# Altium PCB LightLinkV3.0.PcbDoc
Units mil, origin at the board's own origin, x right, y up, seen from the top; angles counter-clockwise.
Board outline 6000 x 4000 mil, 2 copper layers (Top Layer, Bottom Layer); 136 components, 119 nets, 550 pads, 0 vias.
Unrouted connection lines stored in the file: 306.
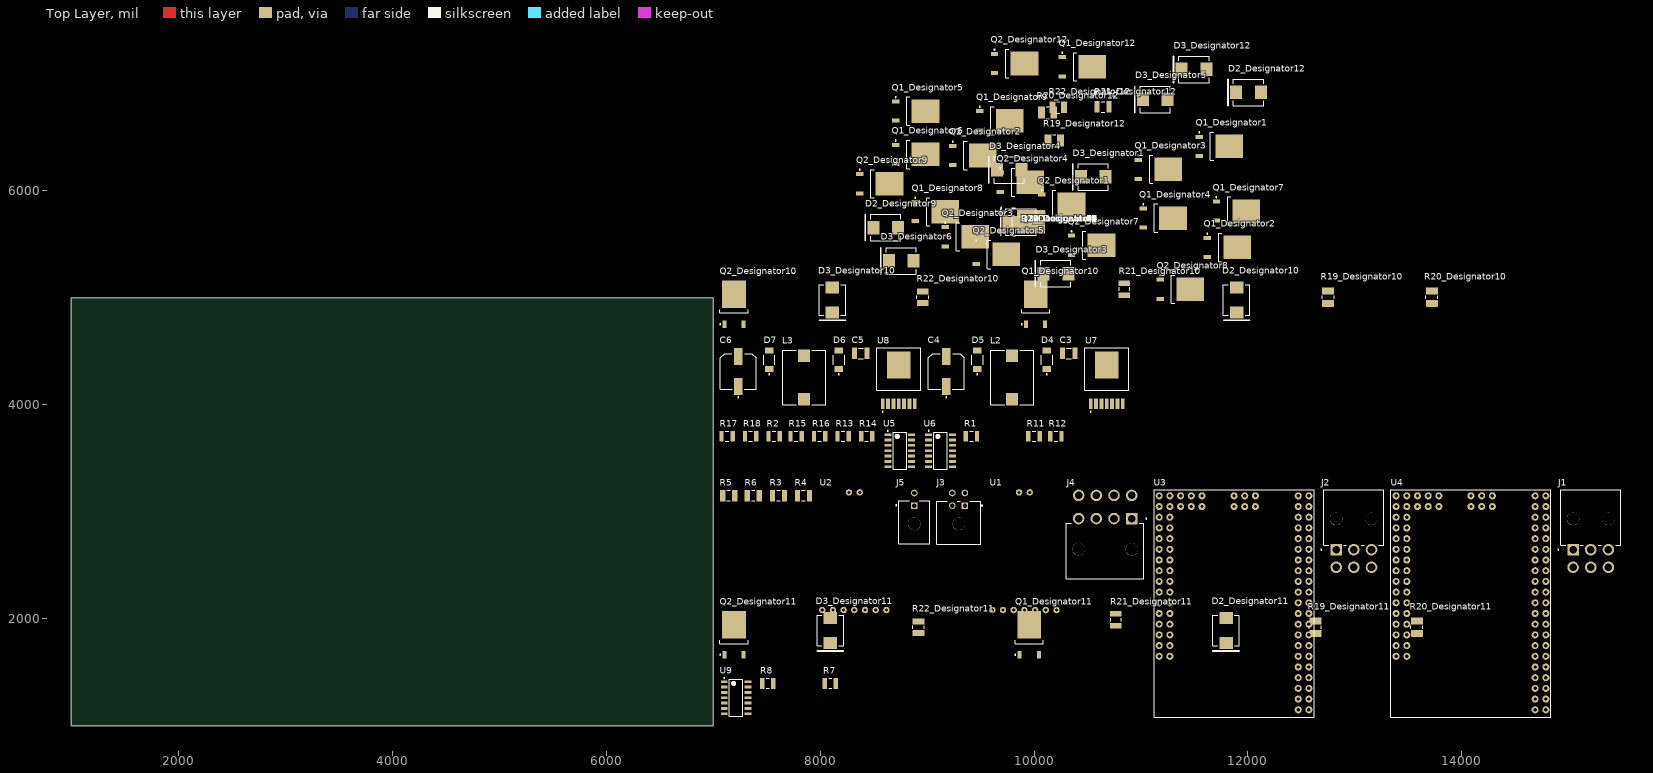
[diagram p0: Top Layer view]
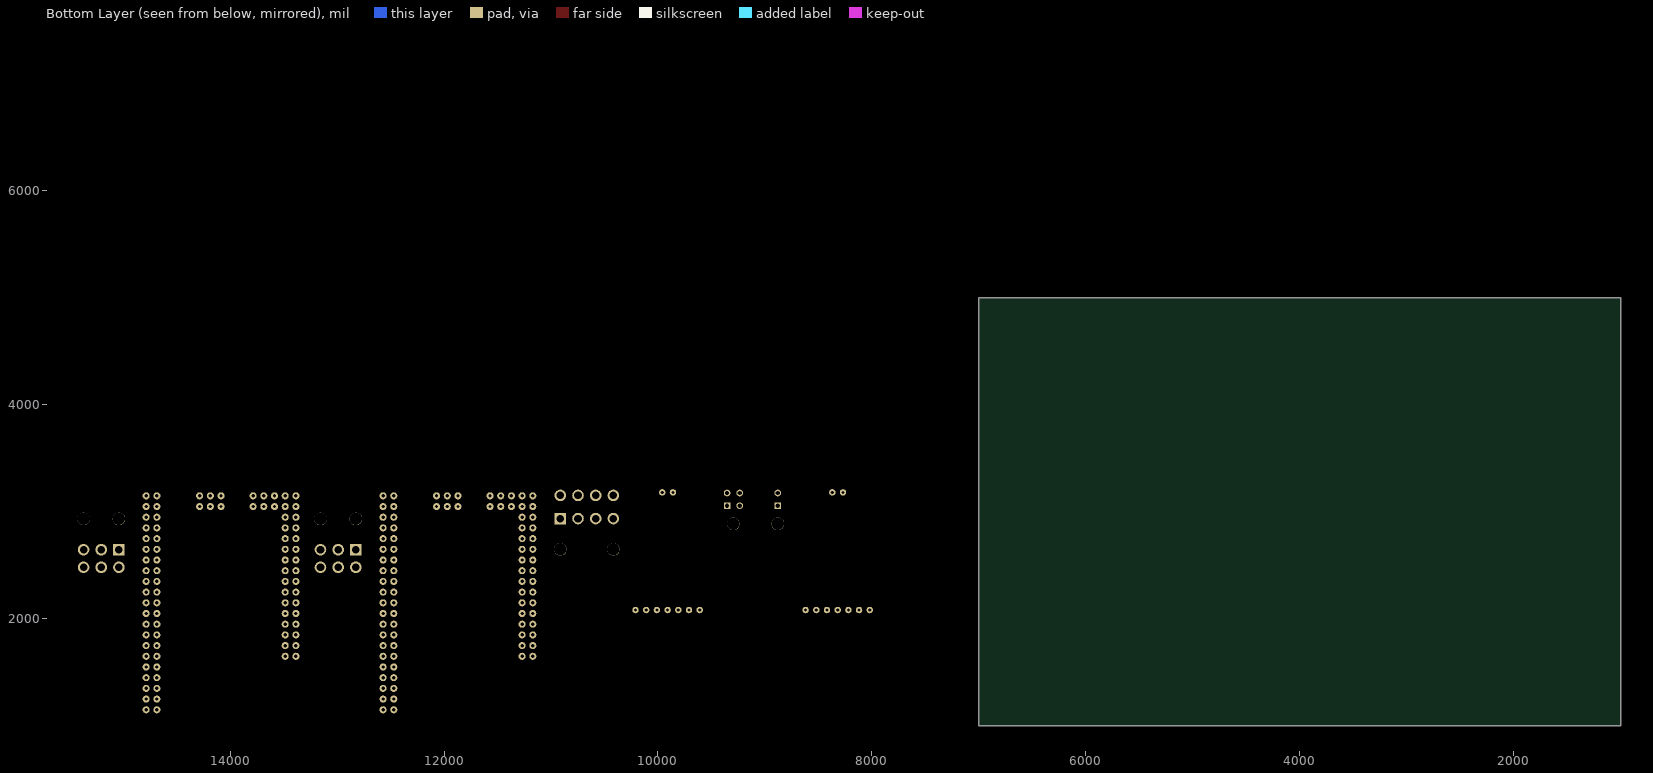
[diagram p1: Bottom Layer view, seen from below]

## Layer stack, top to bottom
Top Solder: solder mask 0.4, Solder Resist, Dk 3.5
Top Layer: signal copper 1.4
Dielectric 1: dielectric 12.6, FR-4, Dk 4.8
Bottom Layer: signal copper 1.4
Bottom Solder: solder mask 0.4, Solder Resist, Dk 3.5

## Board outline
1000,1000 7000,1000 7000,5000 1000,5000

## Design rules (kind name [scope] priority, off if disabled: settings)
Clearance [All] p1: gap=10 ignorepadtopadclearanceinfootprint=FALSE except(0: Arc-Hole Track-Hole SMDPad-Hole THPad-Hole Via-Hole Fill-Hole Poly-Hole Region-Hole Text-Hole)
PolygonConnect [All] p1: connectstyle=Relief reliefconductorwidth=10 reliefentries=4 polygonreliefangle="90 Angle" airgapwidth=10
RoutingVias [All] p1: holewidth=28 width=50 viastyle="Through Hole" minholewidth=28 minwidth=50 maxholewidth=28 maxwidth=50
SolderMaskExpansion [All] p1: expansion=4 istentingtop=FALSE
Width [All] p1: maxlimit=10 minlimit=10 preferedwidth=10
30 further rules are at their usual default settings.

## Classes and differential pairs
component class Designator12: D2_Designator12 D3_Designator12 Q1_Designator12 Q2_Designator12 R19_Designator12 R20_Designator12 R21_Designator12 R22_Designator12
component class Designator11: D2_Designator11 D3_Designator11 Q1_Designator11 Q2_Designator11 R19_Designator11 R20_Designator11 R21_Designator11 R22_Designator11
channel class MOSFET_V2: Designator1 Designator2 Designator3 Designator4 Designator5 Designator6 Designator7 Designator8 Designator9 Designator10 Designator11 Designator12
component class Regulator: C3 C4 C5 C6 D4 D5 D6 D7 L2 L3 U7 U8
component class MOSFET_schematic: R1 R2 R7 R8 R11 R12 R13 R14 R15 R16 R17 R18 U5 U6
component class LightLinkV2: J1 J2 J3 J4 J5 R3 R4 R5 R6 U1 U2 U3 U4
component class Designator10: D2_Designator10 D3_Designator10 Q1_Designator10 Q2_Designator10 R19_Designator10 R20_Designator10 R21_Designator10 R22_Designator10
component class Designator9: D2_Designator9 D3_Designator9 Q1_Designator9 Q2_Designator9 R19_Designator9 R20_Designator9 R21_Designator9 R22_Designator9
component class Designator8: D2_Designator8 D3_Designator8 Q1_Designator8 Q2_Designator8 R19_Designator8 R20_Designator8 R21_Designator8 R22_Designator8
component class Designator7: D2_Designator7 D3_Designator7 Q1_Designator7 Q2_Designator7 R19_Designator7 R20_Designator7 R21_Designator7 R22_Designator7
component class Designator6: D2_Designator6 D3_Designator6 Q1_Designator6 Q2_Designator6 R19_Designator6 R20_Designator6 R21_Designator6 R22_Designator6
component class Designator5: D2_Designator5 D3_Designator5 Q1_Designator5 Q2_Designator5 R19_Designator5 R20_Designator5 R21_Designator5 R22_Designator5
component class Designator4: D2_Designator4 D3_Designator4 Q1_Designator4 Q2_Designator4 R19_Designator4 R20_Designator4 R21_Designator4 R22_Designator4
component class Designator3: D2_Designator3 D3_Designator3 Q1_Designator3 Q2_Designator3 R19_Designator3 R20_Designator3 R21_Designator3 R22_Designator3
component class Designator2: D2_Designator2 D3_Designator2 Q1_Designator2 Q2_Designator2 R19_Designator2 R20_Designator2 R21_Designator2 R22_Designator2
component class Designator1: D2_Designator1 D3_Designator1 Q1_Designator1 Q2_Designator1 R19_Designator1 R20_Designator1 R21_Designator1 R22_Designator1

## Components (designator, comment, footprint, x,y, rotation, side; value= is the part's Value field where it differs from the comment)
C3 "CAP 10nF 250V 1210(3225)" CAPC1210(3225)100_N 10325,4480 r0 top value=10nF
C4 "EEEFT1H221AP" FP-FTF-MFG 9180,4310 r90 top
C5 "CAP 10nF 250V 1210(3225)" CAPC1210(3225)100_N 8380,4480 r0 top value=10nF
C6 "EEEFT1H221AP" FP-FTF-MFG 7235,4310 r90 top
D2_Designator1 "B560C-13-F" DIOD-B5X0C-2_M 9879.5,5709.5 r0 top (schematic designator D2)
D2_Designator2 "B560C-13-F" DIOD-B5X0C-2_M 9879.5,5709.5 r0 top (schematic designator D2)
D2_Designator3 "B560C-13-F" DIOD-B5X0C-2_M 9879.5,5709.5 r0 top (schematic designator D2)
D2_Designator4 "B560C-13-F" DIOD-B5X0C-2_M 9879.5,5709.5 r0 top (schematic designator D2)
D2_Designator5 "B560C-13-F" DIOD-B5X0C-2_M 9879.5,5709.5 r0 top (schematic designator D2)
D2_Designator6 "B560C-13-F" DIOD-B5X0C-2_M 9879.5,5709.5 r0 top (schematic designator D2)
D2_Designator7 "B560C-13-F" DIOD-B5X0C-2_M 9879.5,5709.5 r0 top (schematic designator D2)
D2_Designator8 "B560C-13-F" DIOD-B5X0C-2_M 9879.5,5709.5 r0 top (schematic designator D2)
D2_Designator9 "B560C-13-F" DIOD-B5X0C-2_M 8613.86,5655 r0 top (schematic designator D2)
D2_Designator10 "B560C-13-F" DIOD-B5X0C-2_M 11895,4980 r90 top (schematic designator D2)
D2_Designator11 "B560C-13-F" DIOD-B5X0C-2_M 11795,1890 r90 top (schematic designator D2)
D2_Designator12 "B560C-13-F" DIOD-B5X0C-2_M 12005,6920 r0 top (schematic designator D2)
D3_Designator1 "B560C-13-F" DIOD-B5X0C-2_M 10553.86,6130 r0 top (schematic designator D3)
D3_Designator2 "B560C-13-F" DIOD-B5X0C-2_M 9879.5,5709.5 r0 top (schematic designator D3)
D3_Designator3 "B560C-13-F" DIOD-B5X0C-2_M 10203.86,5225 r0 top (schematic designator D3)
D3_Designator4 "B560C-13-F" DIOD-B5X0C-2_M 9768.86,6195 r0 top (schematic designator D3)
D3_Designator5 "B560C-13-F" DIOD-B5X0C-2_M 11133.86,6855 r0 top (schematic designator D3)
D3_Designator6 "B560C-13-F" DIOD-B5X0C-2_M 8758.86,5345 r0 top (schematic designator D3)
D3_Designator7 "B560C-13-F" DIOD-B5X0C-2_M 9879.5,5709.5 r0 top (schematic designator D3)
D3_Designator8 "B560C-13-F" DIOD-B5X0C-2_M 9879.5,5709.5 r0 top (schematic designator D3)
D3_Designator9 "B560C-13-F" DIOD-B5X0C-2_M 9879.5,5709.5 r0 top (schematic designator D3)
D3_Designator10 "B560C-13-F" DIOD-B5X0C-2_M 8115,4980 r90 top (schematic designator D3)
D3_Designator11 "B560C-13-F" DIOD-B5X0C-2_M 8095,1890 r90 top (schematic designator D3)
D3_Designator12 "B560C-13-F" DIOD-B5X0C-2_M 11495,7135 r0 top (schematic designator D3)
D4 "RSX501LAM20TR" FP-PMDTM-MFG 10120,4420 r90 top
D5 "RSX501LAM20TR" FP-PMDTM-MFG 9470,4420 r90 top
D6 "RSX501LAM20TR" FP-PMDTM-MFG 8175,4420 r90 top
D7 "RSX501LAM20TR" FP-PMDTM-MFG 7525,4420 r90 top
J1 "455580003" FP-455580003-MFG 15205,2940 r0 top
J2 "455580003" FP-455580003-MFG 12990,2940 r0 top
J3 "43045-0400" FP-43045-0400-MFG 9295,2900 r0 top
J4 "39-30-0080" FP-39-30-0080-MFG 10665,2640 r0 top
J5 "43045-0202" FP-43045-0202-MFG 8880,2900 r0 top
L2 "74456047" WE-PD4-L 9795,4255 r90 top
L3 "74456047" WE-PD4-L 7850,4255 r90 top
Q1_Designator1 "SPD30P06P G" INF-PG-TO252-3-1_N 11732.48,6415 r0 top (schematic designator Q1)
Q1_Designator2 "SPD30P06P G" INF-PG-TO252-3-1_N 11807.48,5470 r0 top (schematic designator Q1)
Q1_Designator3 "SPD30P06P G" INF-PG-TO252-3-1_N 11162.48,6200 r0 top (schematic designator Q1)
Q1_Designator4 "SPD30P06P G" INF-PG-TO252-3-1_N 11207.48,5745 r0 top (schematic designator Q1)
Q1_Designator5 "SPD30P06P G" INF-PG-TO252-3-1_N 8892.48,6745 r0 top (schematic designator Q1)
Q1_Designator6 "SPD30P06P G" INF-PG-TO252-3-1_N 8892.48,6340 r0 top (schematic designator Q1)
Q1_Designator7 "SPD30P06P G" INF-PG-TO252-3-1_N 11892.48,5810 r0 top (schematic designator Q1)
Q1_Designator8 "SPD30P06P G" INF-PG-TO252-3-1_N 9077.48,5805 r0 top (schematic designator Q1)
Q1_Designator9 "SPD30P06P G" INF-PG-TO252-3-1_N 9680,6655 r0 top (schematic designator Q1)
Q1_Designator10 "SPD30P06P G" INF-PG-TO252-3-1_N 10015,4940 r90 top (schematic designator Q1)
Q1_Designator11 "SPD30P06P G" INF-PG-TO252-3-1_N 9955,1850 r90 top (schematic designator Q1)
Q1_Designator12 "SPD30P06P G" INF-PG-TO252-3-1_N 10452.48,7160 r0 top (schematic designator Q1)
Q2_Designator1 "SPD30P06P G" INF-PG-TO252-3-1_N 10257.48,5875 r0 top (schematic designator Q2)
Q2_Designator2 "SPD30P06P G" INF-PG-TO252-3-1_N 9427.48,6330 r0 top (schematic designator Q2)
Q2_Designator3 "SPD30P06P G" INF-PG-TO252-3-1_N 9357.48,5570 r0 top (schematic designator Q2)
Q2_Designator4 "SPD30P06P G" INF-PG-TO252-3-1_N 9872.48,6080 r0 top (schematic designator Q2)
Q2_Designator5 "SPD30P06P G" INF-PG-TO252-3-1_N 9647.48,5405 r0 top (schematic designator Q2)
Q2_Designator6 "SPD30P06P G" INF-PG-TO252-3-1_N 9879.5,5709.5 r0 top (schematic designator Q2)
Q2_Designator7 "SPD30P06P G" INF-PG-TO252-3-1_N 10537.48,5490 r0 top (schematic designator Q2)
Q2_Designator8 "SPD30P06P G" INF-PG-TO252-3-1_N 11367.48,5080 r0 top (schematic designator Q2)
Q2_Designator9 "SPD30P06P G" INF-PG-TO252-3-1_N 8557.48,6065 r0 top (schematic designator Q2)
Q2_Designator10 "SPD30P06P G" INF-PG-TO252-3-1_N 7195,4940 r90 top (schematic designator Q2)
Q2_Designator11 "SPD30P06P G" INF-PG-TO252-3-1_N 7195,1850 r90 top (schematic designator Q2)
Q2_Designator12 "SPD30P06P G" INF-PG-TO252-3-1_N 9817.48,7190 r0 top (schematic designator Q2)
R1 "ERJ14BQFR68U" RESC3225X70X50LL20T20 9415,3705 r0 top
R2 "ERJ14BQFR68U" RESC3225X70X50LL20T20 7570,3705 r0 top
R3 "ERJ-14NF1001U" RESC3225X70X50NL20T20 7610,3150 r0 top
R4 "ERJ-14YJ302U" RESC3225X70X50NL20T20 7845,3150 r0 top
R5 "ERJ-14NF1001U" RESC3225X70X50NL20T20 7145,3150 r0 top
R6 "ERJ-14YJ302U" RESC3225X70X50NL20T20 7375,3150 r0 top
R7 "ERJ14BQFR68U" RESC3225X70X50LL20T20 8095,1395 r0 top
R8 "ERJ14BQFR68U" RESC3225X70X50LL20T20 7510,1395 r0 top
R11 "ERJ14BQFR68U" RESC3225X70X50LL20T20 10000,3705 r0 top
R12 "ERJ14BQFR68U" RESC3225X70X50LL20T20 10205,3705 r0 top
R13 "ERJ14BQFR68U" RESC3225X70X50LL20T20 8215,3705 r0 top
R14 "ERJ14BQFR68U" RESC3225X70X50LL20T20 8435,3705 r0 top
R15 "ERJ14BQFR68U" RESC3225X70X50LL20T20 7775,3705 r0 top
R16 "ERJ14BQFR68U" RESC3225X70X50LL20T20 7995,3705 r0 top
R17 "ERJ14BQFR68U" RESC3225X70X50LL20T20 7130,3705 r0 top
R18 "ERJ14BQFR68U" RESC3225X70X50LL20T20 7350,3705 r0 top
R19_Designator1 "RMCF1210FT1K00" FP-RMCF1210-IPC_A 9879.5,5709.5 r0 top (schematic designator R19)
R19_Designator2 "RMCF1210FT1K00" FP-RMCF1210-IPC_A 9879.5,5709.5 r0 top (schematic designator R19)
R19_Designator3 "RMCF1210FT1K00" FP-RMCF1210-IPC_A 9879.5,5709.5 r0 top (schematic designator R19)
R19_Designator4 "RMCF1210FT1K00" FP-RMCF1210-IPC_A 9879.5,5709.5 r0 top (schematic designator R19)
R19_Designator5 "RMCF1210FT1K00" FP-RMCF1210-IPC_A 9879.5,5709.5 r0 top (schematic designator R19)
R19_Designator6 "RMCF1210FT1K00" FP-RMCF1210-IPC_A 9879.5,5709.5 r0 top (schematic designator R19)
R19_Designator7 "RMCF1210FT1K00" FP-RMCF1210-IPC_A 9879.5,5709.5 r0 top (schematic designator R19)
R19_Designator8 "RMCF1210FT1K00" FP-RMCF1210-IPC_A 9879.5,5709.5 r0 top (schematic designator R19)
R19_Designator9 "RMCF1210FT1K00" FP-RMCF1210-IPC_A 9879.5,5709.5 r0 top (schematic designator R19)
R19_Designator10 "RMCF1210FT1K00" FP-RMCF1210-IPC_A 12750,5005 r90 top (schematic designator R19)
R19_Designator11 "RMCF1210FT1K00" FP-RMCF1210-IPC_A 12630,1920 r90 top (schematic designator R19)
R19_Designator12 "RMCF1210FT1K00" FP-RMCF1210-IPC_A 10189.5,6469.5 r0 top (schematic designator R19)
R20_Designator1 "RMCF1210JT3R00" FP-RMCF1210-IPC_A 9879.5,5709.5 r0 top (schematic designator R20)
R20_Designator2 "RMCF1210JT3R00" FP-RMCF1210-IPC_A 9879.5,5709.5 r0 top (schematic designator R20)
R20_Designator3 "RMCF1210JT3R00" FP-RMCF1210-IPC_A 9879.5,5709.5 r0 top (schematic designator R20)
R20_Designator4 "RMCF1210JT3R00" FP-RMCF1210-IPC_A 9879.5,5709.5 r0 top (schematic designator R20)
R20_Designator5 "RMCF1210JT3R00" FP-RMCF1210-IPC_A 9879.5,5709.5 r0 top (schematic designator R20)
R20_Designator6 "RMCF1210JT3R00" FP-RMCF1210-IPC_A 9879.5,5709.5 r0 top (schematic designator R20)
R20_Designator7 "RMCF1210JT3R00" FP-RMCF1210-IPC_A 9879.5,5709.5 r0 top (schematic designator R20)
R20_Designator8 "RMCF1210JT3R00" FP-RMCF1210-IPC_A 9879.5,5709.5 r0 top (schematic designator R20)
R20_Designator9 "RMCF1210JT3R00" FP-RMCF1210-IPC_A 9879.5,5709.5 r0 top (schematic designator R20)
R20_Designator10 "RMCF1210JT3R00" FP-RMCF1210-IPC_A 13720,5005 r90 top (schematic designator R20)
R20_Designator11 "RMCF1210JT3R00" FP-RMCF1210-IPC_A 13580,1920 r90 top (schematic designator R20)
R20_Designator12 "RMCF1210JT3R00" FP-RMCF1210-IPC_A 10126.91,6730 r0 top (schematic designator R20)
R21_Designator1 "ERJ-14NF1002U" RESC3225X70X50NL20T20 9879.5,5709.5 r0 top (schematic designator R21)
R21_Designator2 "ERJ-14NF1002U" RESC3225X70X50NL20T20 9879.5,5709.5 r0 top (schematic designator R21)
R21_Designator3 "ERJ-14NF1002U" RESC3225X70X50NL20T20 9879.5,5709.5 r0 top (schematic designator R21)
R21_Designator4 "ERJ-14NF1002U" RESC3225X70X50NL20T20 9879.5,5709.5 r0 top (schematic designator R21)
R21_Designator5 "ERJ-14NF1002U" RESC3225X70X50NL20T20 9879.5,5709.5 r0 top (schematic designator R21)
R21_Designator6 "ERJ-14NF1002U" RESC3225X70X50NL20T20 9879.5,5709.5 r0 top (schematic designator R21)
R21_Designator7 "ERJ-14NF1002U" RESC3225X70X50NL20T20 9879.5,5709.5 r0 top (schematic designator R21)
R21_Designator8 "ERJ-14NF1002U" RESC3225X70X50NL20T20 9879.5,5709.5 r0 top (schematic designator R21)
R21_Designator9 "ERJ-14NF1002U" RESC3225X70X50NL20T20 9879.5,5709.5 r0 top (schematic designator R21)
R21_Designator10 "ERJ-14NF1002U" RESC3225X70X50NL20T20 10845,5080 r90 top (schematic designator R21)
R21_Designator11 "ERJ-14NF1002U" RESC3225X70X50NL20T20 10765,1990 r90 top (schematic designator R21)
R21_Designator12 "ERJ-14NF1002U" RESC3225X70X50NL20T20 10643.9,6785 r0 top (schematic designator R21)
R22_Designator1 "RMCF1210JT12R0" FP-RMCF1210-IPC_B 9879.5,5709.5 r0 top (schematic designator R22)
R22_Designator2 "RMCF1210JT12R0" FP-RMCF1210-IPC_B 9879.5,5709.5 r0 top (schematic designator R22)
R22_Designator3 "RMCF1210JT12R0" FP-RMCF1210-IPC_B 9879.5,5709.5 r0 top (schematic designator R22)
R22_Designator4 "RMCF1210JT12R0" FP-RMCF1210-IPC_B 9879.5,5709.5 r0 top (schematic designator R22)
R22_Designator5 "RMCF1210JT12R0" FP-RMCF1210-IPC_B 9879.5,5709.5 r0 top (schematic designator R22)
R22_Designator6 "RMCF1210JT12R0" FP-RMCF1210-IPC_B 9879.5,5709.5 r0 top (schematic designator R22)
R22_Designator7 "RMCF1210JT12R0" FP-RMCF1210-IPC_B 9879.5,5709.5 r0 top (schematic designator R22)
R22_Designator8 "RMCF1210JT12R0" FP-RMCF1210-IPC_B 9879.5,5709.5 r0 top (schematic designator R22)
R22_Designator9 "RMCF1210JT12R0" FP-RMCF1210-IPC_B 9879.5,5709.5 r0 top (schematic designator R22)
R22_Designator10 "RMCF1210JT12R0" FP-RMCF1210-IPC_B 8960,5005 r90 top (schematic designator R22)
R22_Designator11 "RMCF1210JT12R0" FP-RMCF1210-IPC_B 8920,1920 r90 top (schematic designator R22)
R22_Designator12 "RMCF1210JT12R0" FP-RMCF1210-IPC_B 10225,6780 r0 top (schematic designator R22)
U1 "MCP2515 Shield" "MCP2515 Shield-Footprint-1" 9610,2080 r90 top
U2 "MCP2515 Shield" "MCP2515 Shield-Footprint-1" 8020,2080 r90 top
U3 "MEGA_PRO_EMBED_CH340G_/_ATMEGA2560" MODULE_MEGA_PRO_EMBED_CH340G_/_ATMEGA2560 11870,2140 r90 top
U4 "MEGA_PRO_EMBED_CH340G_/_ATMEGA2560" MODULE_MEGA_PRO_EMBED_CH340G_/_ATMEGA2560 14085,2140 r90 top
U5 "TL074CD" D0014A_M 8745,3570 r0 top
U6 "TL074CD" D0014A_M 9125,3570 r0 top
U7 "LM22679TJE-5.0/NOPB" FP-NDR0007A-MFG 10680,4335 r0 top
U8 "LM22679TJE-5.0/NOPB" FP-NDR0007A-MFG 8735,4335 r0 top
U9 "TL074CD" D0014A_M 7215,1260 r0 top

## Footprints (in the part's own frame and the unit in brackets; to place one, negate y for a bottom-side part, rotate by r counter-clockwise, add the part's x,y. Pads: shape width x height; smd on the part's side, far side on the other; paste and mask are expansions set on the pad)
CAPC1210(3225)100_N [mm] "Chip Capacitor, Body 3.2x2.5mm, Height 1mm, IPC Medium Density"
  rect 1.15x2.7 smd: 1(-1.5,0) 2(1.5,0)
  silkscreen extent -0.55,-1.25 0.55,1.25, body extent -1.7,-1.35 1.7,1.35, height 1
D0014A_M [mm] "SOIC, 14-Leads, Body 8.75x4mm, Pitch 1.27mm, IPC Low Density"
  rrect15% 1.65x0.65 smd: 1(-2.825,3.81) 2(-2.825,2.54) 3(-2.825,1.27) 4(-2.825,0) 5(-2.825,-1.27) 6(-2.825,-2.54) 7(-2.825,-3.81) 8(2.825,-3.81) 9(2.825,-2.54) 10(2.825,-1.27) 11(2.825,0) 12(2.825,1.27) 13(2.825,2.54) 14(2.825,3.81)
  silkscreen extent -2.95,-4.38 1.6,4.81, body extent -3.02,-4.32 3.02,4.32, height 1.59
DIOD-B5X0C-2_M [mm] "Molded Diode, 2-Leads, Body 7.11x6.22mm, IPC Low Density"
  rect 2.85x3.2 smd: 1(-2.95,0) 2(2.95,0)
  silkscreen extent -4.87,-3.15 3.6,3.15, body extent -3.56,-3.11 3.55,3.11, height 2.63
FP-39-30-0080-MFG [mm]
  rect 2.75x2.75 hole 1.8 paste-1000 mask+0: 1(6.3,7.5)
  round 2.75 hole 1.8 paste-1000 mask+0: 2(2.1,7.5) 3(-2.1,7.5) 4(-6.3,7.5) 5(6.3,13) 6(2.1,13) 7(-2.1,13) 8(-6.3,13)
  round 3 hole 3 unplated paste-1000 mask+0: ""(-6.3,0.2) ""(6.3,0.2)
  silkscreen extent -9.19,-6.78 9.92,7.62, body extent -9.29,-6.88 9.29,14.48, height 0.25
FP-43045-0202-MFG [mm]
  rect 1.57x1.57 hole 1.02 paste-1000 mask+0: 1(0,3.965)
  round 1.57 hole 1.02 paste-1000 mask+0: 2(0,6.965)
  round 3 hole 3 unplated paste-1000 mask+0: ""(0,-0.355)
  silkscreen extent -4.4,-5.08 3.7,5.08, body extent -3.8,-5.18 3.8,7.85, height 0.25
FP-43045-0400-MFG [mm]
  rect 1.57x1.57 hole 1.02 paste-1000 mask+0: 1(1.5,3.965)
  round 1.57 hole 1.02 paste-1000 mask+0: 2(-1.5,3.965) 3(1.5,6.965) 4(-1.5,6.965)
  round 3 hole 3 unplated paste-1000 mask+0: ""(0,-0.355)
  silkscreen extent -5.2,-5.21 5.68,4.95, body extent -5.3,-5.31 5.3,7.85, height 0.25
FP-455580003-MFG [mm]
  rect 2.75x2.75 hole 1.8 paste-1000 mask+0: 1(-4.2,-7.5)
  round 2.75 hole 1.8 paste-1000 mask+0: 2(0,-7.5) 3(4.2,-7.5) 4(-4.2,-11.7) 5(0,-11.7) 6(4.2,-11.7)
  round 3 hole 3 unplated paste-1000 mask+0: ""(-4.2,-0.2) ""(4.2,-0.2)
  silkscreen extent -7.81,-7.62 7.09,6.78, body extent -7.19,-13.18 7.19,6.88, height 0.25
FP-FTF-MFG [mm]
  rect 4x2 smd paste+0 mask+0: 1(-3.55,0) 2(3.55,0)
  silkscreen extent -6.27,-4.25 4.25,4.25, body extent -5.8,-4.5 5.8,4.5, height 0.25
FP-NDR0007A-MFG [mm]
  rect 0.91x2.41 smd paste+0 mask+0: 1(-3.81,-8.28) 2(-2.54,-8.28) 3(-1.27,-8.28) 4(0,-8.28) 5(1.27,-8.28) 6(2.54,-8.28) 7(3.81,-8.28)
  rect 5.59x6.35 smd paste-1000 mask+0: 8(0,0.91)
  silkscreen extent -5.21,-10.27 5.21,5.05, body extent -5.31,-9.58 5.31,5.15, height 0.25
FP-PMDTM-MFG [mm]
  rect 1.4x2 smd paste+0 mask+0: 1(-2.2,0) 2(2.2,0)
  silkscreen extent -3.57,-1.35 1.12,1.35, body extent -3,-1.45 3,1.45, height 0.25
FP-RMCF1210-IPC_A [mil]
  rect 63.14x112.4 smd paste+0 mask+0: 1(-58.09,0) 2(58.09,0)
  silkscreen extent -15,-56 15,56, body extent -109,-76 109,76, height 10
FP-RMCF1210-IPC_B [mil]
  rect 55.27x108.46 smd paste+0 mask+0: 1(-54.16,0) 2(54.16,0)
  silkscreen extent -15,-54 15,54, body extent -92,-64 92,64, height 10
INF-PG-TO252-3-1_N [mm] "DPAK, 3-Leads, Body 6.525x6.12mm, Pitch 2.28mm, IPC Medium Density"
  rect 1.75x0.95 smd: 1(-4.75,2.28) 3(-4.75,-2.28)
  rect 6.6x5.6 smd: 2(2.35,0)
  silkscreen extent -4.87,-3.35 -1.35,3.43, body extent -2.1,-3.32 4.12,3.32, height 2.35
"MCP2515 Shield-Footprint-1" [mil]
  round 60 hole 30: 1(0,0) 2(0,-100) 3(0,-200) 4(0,-300) 5(0,-400) 6(0,-500) 7(0,-600) 8(1100,-350) 9(1100,-250)
MODULE_MEGA_PRO_EMBED_CH340G_/_ATMEGA2560 [mil]
  round 66 hole 31.5: 3V3_1(-692.13,-700) 3V3_2(-692.13,-600) 5V_1(-792.13,-700) 5V_2(-792.13,-600) 5V_3(1007.87,0) A0(-492.13,700) A1(-492.13,600) A2(-392.13,700) A3(-392.13,600) A4(-292.13,700) A5(-292.13,600) A6(-192.13,700) A7(-192.13,600) A8(-92.13,700) A9(-92.13,600) A10(7.87,700) A11(7.87,600) A12(107.87,700) A13(107.87,600) A14(207.87,700) A15(207.87,600) AREF(-592.13,-600) D2(-392.13,-600) D3(-392.13,-700) D4(-292.13,-600) D5(-292.13,-700) D6(-192.13,-600) D7(-192.13,-700) D8(-92.13,-600) D9(-92.13,-700) D10(7.87,-600) D11(7.87,-700) D12(107.87,-600) D13(107.87,-700) D14(207.87,-600) D15(207.87,-700) D16(307.87,-600) D17(307.87,-700) D18(407.87,-600) D19(407.87,-700) D20(507.87,-600) D21(507.87,-700) D22(607.87,-600) D23(607.87,-700) D24(707.87,-600) D25(707.87,-700) D26(807.87,-600) D27(807.87,-700) D28(907.87,-600) D29(907.87,-700) D30(1007.87,-600) D31(1007.87,-700) D32(307.87,700) D33(307.87,600) D34(407.87,700) D35(407.87,600) D36(507.87,700) D37(507.87,600) D38(607.87,700) D39(607.87,600) D40(707.87,700) D41(707.87,600) D42(807.87,700) D43(807.87,600) D44(907.87,700) D45(907.87,600) D46(1007.87,700) D47(1007.87,600) D48(1007.87,500) D49(907.87,500) D50(1007.87,400) D51(907.87,400) D52(1007.87,300) D53(907.87,300) GND_1(-892.13,-700) GND_2(-892.13,-600) GND_3(1007.87,-200) MISO(907.87,0) MOSI(1007.87,-100) RESET(907.87,-200) RST(-592.13,-700) RX(-492.13,-600) SCK(907.87,-100) TX(-492.13,-700) VIN_1(-992.13,-700) VIN_2(-992.13,-600)
  silkscreen extent -1063,-748 1063,748
RESC3225X70X50LL20T20 [mm] "Chip Resistor, 2-Leads, Body 3.20x2.50mm, IPC High Density"
  rect 1.05x2.6 smd: 1(-1.325,0) 2(1.325,0)
  silkscreen extent -0.4,-1.2 0.4,1.2, body extent -1.7,-1.35 1.7,1.35, height 0.7
RESC3225X70X50NL20T20 [mm] "Chip Resistor, 2-Leads, Body 3.20x2.50mm, IPC Medium Density"
  rect 1.25x2.7 smd: 1(-1.425,0) 2(1.425,0)
  silkscreen extent -0.4,-1.25 0.4,1.25, body extent -1.7,-1.35 1.7,1.35, height 0.7
WE-PD4-L [mm] "SMD Inductor, 2-Leads, Body 12.7 x 10.0 mm"
  rect 3x2.8 smd: 1(-5.15,0) 2(5.15,0)
  silkscreen extent -6.45,-5.1 6.45,5.1, body extent -6.35,-4.95 6.35,4.97, height 4.99

## Part data
C3 C5: library part CMP-1038-01142-1, "CAP 10nF 250V ±10% 1210 (3225 Metric) Thickness 1mm SMD", Case-EIA=1210, Case-Metric=3225, Rated Voltage="250 V", Tolerance=Â±10%, Max Thickness="1 mm", Technology=SMT
C4 C6: library part CMP-05427-000092-1, "CAP ALUM 220UF 20% 50V SMD", Capacitance=220uF, Case/Package=Radial, Dielectric Material=Aluminium, ESR (Equivalent Series Resistance)=180mR, Leakage Current=110uA, Max Operating Temperature=105°C, Min Operating Temperature=-55°C, Package Quantity=500, Ripple Current=670mA, Tolerance=20%, Voltage=50V, Construction=Cylindrical, Contact Plating=Tin, Diameter=8mm, Height=10.2mm, Height - Seated (Max)=0.413inch, Lead Diameter=0.9mm, Lead Free="Lead Free", Lead Pitch=3.1mm, Length=10.2mm, Life (Hours)=2000Hour, Mount="Surface Mount", Number of Pins=2, Packaging="Tape and Reel", Radiation Hardening=No, REACH SVHC="No SVHC", Ripple Current (AC)=670mA, RoHS Compliant=Yes, Series=FT, Termination=SMD/SMT, Voltage Rating=50V, Voltage Rating (DC)=50V
D2_Designator1 D2_Designator2 D2_Designator3 D2_Designator4 D2_Designator5 D2_Designator6 D2_Designator7 D2_Designator8 D2_Designator9 D2_Designator10 D2_Designator11 D2_Designator12 D3_Designator1 D3_Designator2 D3_Designator3 D3_Designator4 D3_Designator5 D3_Designator6 D3_Designator7 D3_Designator8 D3_Designator9 D3_Designator10 D3_Designator11 D3_Designator12: library part CMP-2000-05098-2, "Schottky Barrier Rectifier, 5 A, 60 V, -55 to 125 degC, 2-Pin SMD, RoHS, Tape and Reel", If - Forward Current=5A, Ifsm - Forward Surge Current=100A, Ir - Reverse Current=500uA, Manufacturer=DiodesIncorporated, Maximum Operating Temperature=+125C, Minimum Operating Temperature=-55C, Operating Temperature Range=-55Cto+125C, Package / Case=SMC, Vf - Forward Voltage=0.7V, Vrrm - Repetitive Reverse Voltage=60V, Brand=DiodesIncorporated, Configuration=Single, Datasheet URL=https://datasheet.ciiva.com/27052/1538961-27052355.pdf, Datasheet Version="Rev. 7-2, 06/2007", Factory Pack Quantity=3000, Height=2.5mm, Length=7.11mm, Manufacturer URL=http://www.diodes.com/, Mounting Style=SMD/SMT, Packaging=Reel, Product=SchottkyDiodes, Product Category=SchottkyDiodes&Rectifiers, RoHS=True, Series=B560, Technology=Si, Termination Style=SMD/SMT, Type=SchottkyBarrierRectifier, Unit Weight=0.007408oz, Width=6.22mm
D4 D5 D6 D7: library part CMP-08971-000008-1, "DIODE SCHOTTKY 20V 5A PMDTM", Forward Current=5A, Manufacturer=Rohm, Max Junction Temp=+125°C, Max Repetitive Reverse Voltage=25V, Max Surge Forward Current=100A, Package=PMDTM, Peak Reverse Current=500uA, Reverse Voltage=20V, Temperature="to +125°C", Automotive=No, Category=Diode, ComponentLink2Description=Datasheet, ComponentLink2URL=https://fscdn.rohm.com/en/products/databook/datasheet/discrete/diode/schottky_barrier/rsx501lam20tr-e.pdf, Device Class L1="Discrete Semiconductors", Device Class L2=Diodes, Device Class L3="Schottky Diodes", Digikey Description="DIODE SCHOTTKY 20V 5A PMDTM", Height=1.05mm, Lead Free=Yes, Manufacturer Part Number=RSX501LAM20TR, Octopart=https://octopart.com/rsx501lam20tr-rohm-82270774, RoHS=TRUE, Temperature Range High=+125°C
J1 J2: library part CMP-04776-000024-1, "CONN HEADER R/A 6POS 4.2MM", Current Rating=8A, Manufacturer=Molex, Package=0, Temperature="-40°C to +105°C", Temperature Range High=+105°C, Temperature Range Low=-40°C, Voltage Rating=600V, Automotive=No, Category=Conn, ComponentLink2Description=Datasheet, ComponentLink2URL=https://www.molex.com/webdocs/datasheets/pdf/en-us/0455580003_PCB_HEADERS.pdf, Conn Gender=Male, Conn Orientation="Right Angle", Contact Material=Tin,Nickel, Device Class L1=Connectors, Device Class L2="Headers and Wire Housings", Device Class L3=unset, Digikey Description="CONN HEADER R/A 6POS 4.2MM", Footprint Url=https://www.molex.com/pdm_docs/sd/455580003_sd.pdf, Height=10.38mm, Lead Free=Yes, Manufacturer Part Number=455580003, Mouser Description="Conn Power HDR 6 POS 4.2mm Solder ST Thru-Hole 6 Terminal 1 Port Mini-Fit Jr™ Tray", Number of Contacts=6, Number of Rows=2, Octopart=https://octopart.com/45558-0003-molex-7672845, Pitch=4.2mm, RoHS=TRUE, Standoff Height=0.4mm
J3: library part CMP-04776-000002-1, "CONN HEADER R/A 4POS 3MM", Current Rating=8.5A, Manufacturer=Molex, Temperature="-40°C to +105°C", Temperature Range High=+105°C, Temperature Range Low=-40°C, Voltage Rating=600V, Automotive=No, Category=Conn, ComponentLink2Description=Datasheet, ComponentLink2URL=https://www.molex.com/webdocs/datasheets/pdf/en-us/0430450400_PCB_HEADERS.pdf, Conn Gender=Male, Conn Orientation="Right Angle", Contact Material=Tin,Nickel, Device Class L1=Connectors, Device Class L2="Headers and Wire Housings", Device Class L3=unset, Digikey Description="CONN HEADER R/A 4POS 3MM", Footprint Url=https://www.molex.com/pdm_docs/sd/430450400_sd.pdf, Height=9.27mm, Is Female=yes, Lead Free=Yes, Manufacturer Part Number=43045-0400, Number of Contacts=4, Number of Rows=2, Octopart=https://octopart.com/43045-0400-molex-287063, Package=43045-0400, Pitch=3mm, RoHS=TRUE
J4: library part CMP-04776-000387-1, "CONN HEADER R/A 8POS 4.2MM", Color=Natural, Contact Resistance=10mR, Current Rating=13A, Flammability Rating="UL94 V-0", Insulation Resistance=1GR, Max Current Rating=7A, Max Operating Temperature=105°C, Max Voltage Rating (AC)=600V, Min Operating Temperature=-40°C, Package Quantity=225, Approvals=UL, Contact Gender=Male, Contact Material=Brass, Contact Plating=Tin, Contact Type="Male Pin", Depth=19.4mm, ELV=Compliant, Fastening Type=Ramp, Gender=Male, Glow Wire Compliant=Non-compliant, Halogen Free="Low Halogen", Height=11.4mm, Housing Color=Natural, Housing Material=Nylon, Lead Free="Lead Free", Length=18mm, Material=Nylon, Mount="Through Hole", Number of Circuits=8, Number of Contacts=8, Number of Ports=1, Number of Positions=8, Number of Rows=2, Number of Terminals/Pins=8, Orientation="Right Angle", Packaging=Bag, Pitch=4.2mm, Row Spacing=0.165inch, Series="Mini-Fit® Jr™ 5569", Termination=Solder, Voltage Rating=600V, Voltage Rating (DC)=600V, Width=11.4mm
J5: library part CMP-04776-000660-1, "CONN HEADER R/A 2POS", Case/Package=SMC, Color=Black, Contact Resistance=10mR, Current Rating=5A, Flammability Rating="UL94 V-0", Insulation Resistance=1GR, Max Operating Temperature=105°C, Max Voltage Rating (DC)=250.25kV, Min Operating Temperature=-40°C, Package Quantity=3168, Voltage Rating=600V, Voltage Rating (DC)=250V, Contact Material=Brass, Contact Plating=Gold, Depth=12.2mm, Diameter=3mm, Gender=Male, Glow Wire Compliant=Compliant, Halogen Free="Low Halogen", Height=8.77mm, Housing Color=Black, Housing Material=Thermoplastic, Lead Free="Contains Lead", Length=7.15mm, Max Current Rating=5A, Mount="Through Hole", Number of Circuits=2, Number of Contacts=2, Number of Positions=2, Number of Rows=2, Orientation="Right Angle", Packaging=Tray, Pitch=3mm, Radiation Hardening=No, RoHS Compliant=Yes, Series="Micro-Fit 3.0", Termination=Solder
L2 L3: library part CMP-0227-00798-1, "SMD-Power Inductor WE-PD4, L = 4.70 µH", Inductance="4.70 ÂµH", ComponentLink1Description="Manufacturer Link", ComponentLink1URL=http://www.we-online.com, ComponentLink2Description=Datasheet, ComponentLink2URL=http://www.we-online.de/katalog/media/pdf/74456047.pdf, DatasheetVersion="ver 2, Sep-2006", PackageDescription="SMD Inductor, 2-Leads, Body 12.7 x 10.0 mm", PackageReference=WE-PD4-L, PackageVersion=2006
Q1_Designator1 Q1_Designator2 Q1_Designator3 Q1_Designator4 Q1_Designator5 Q1_Designator6 Q1_Designator7 Q1_Designator8 Q1_Designator9 Q1_Designator10 Q1_Designator11 Q1_Designator12 Q2_Designator1 Q2_Designator2 Q2_Designator3 Q2_Designator4 Q2_Designator5 Q2_Designator6 Q2_Designator7 Q2_Designator8 Q2_Designator9 Q2_Designator10 Q2_Designator11 Q2_Designator12: library part CMP-1099-00058-1, "P-Channel SIPMOS Power-Transistor, -60 V VDS, -30 A ID, -55 to 175 degC, PG-TO252-3-1, Reel, Green", Manufacturer=Infineon, ComponentLink1Description="Manufacturer URL", ComponentLink1URL=http://www.infineon.com/, ComponentLink2Description=Datasheet, ComponentLink2URL=http://www.infineon.com/dgdl/SPD30P06P_Rev.2.3_pdf.pdf?folderId=db3a30431ed1d7b2011f4042f2ff4ec5&fileId=db3a30431ed1d7b2011f404fbc7e4ef4, ComponentLink3Description="Package Specification", ComponentLink3URL=http://www.infineon.com/dgdl/TLE42744_DS_11.pdf?folderId=db3a304318f3fe290118f5a433570040&fileId=db3a304327b897500128012ccafe37d2&sId=db3a30443d67b5ca013d83f7c0ea327b, DatasheetVersion="Rev. 2.3", Green=TRUE, ID (max)="-30Â A", IDpuls (max)="-120Â A", Mounting Technology="Surface Mount", PackageDescription="3-Pin Plastic (Green) Transistor Single Outline Package, 6.5 x 6.12 mm Body, 2.28 mm Pitch", PackageReference=PG-TO252-3-1, PackageVersion=Jan-10, Packing=Reel, PartNumber="SPD30P06P G", Pto t (max)="125Â W", QG="32Â nC", RDS (on) (max)="75Â mOhm", Rth="1.2Â K/W", RthJC (max)="1.2Â K/W", VDS (max)="-60Â V", VGS(th) (max)="-4Â V", VGS(th) (min)="-2.1Â V"
R1 R2 R7 R8 R11 R12 R13 R14 R15 R16 R17 R18: library part CMP-2005-03807-1, Manufacturer=Panasonic, Part Number=ERJ14BQFR68U
R3 R5: library part CMP-2005-01957-1, Manufacturer=Panasonic, Part Number=ERJ-14NF1001U
R4 R6: library part CMP-2005-03553-1, Manufacturer=Panasonic, Part Number=ERJ-14YJ302U
R19_Designator1 R19_Designator2 R19_Designator3 R19_Designator4 R19_Designator5 R19_Designator6 R19_Designator7 R19_Designator8 R19_Designator9 R19_Designator10 R19_Designator11 R19_Designator12: library part CMP-26527-007195-1, "1kΩ ±1% 0.5W 1210 Thick Film Chip Resistor AEC-Q200 compliant", Case Code (Imperial)=1210, Case Code (Metric)=3225, Max Operating Temperature=155°C, Max Power Dissipation=333mW, Min Operating Temperature=-55°C, Resistance=1kR, Resistor Type="Thick Film", Temperature Coefficient=100ppm/°C, Tolerance=1%, Case/Package=1210, Construction=Rectangular, Contact Plating=Tin, Depth=2.5mm, Features="Automotive AEC-Q200", Height=0.028inch, Lead Free="Lead Free", Length=3.2mm, Military Standard=Not, Mount="Surface Mount", Number of Terminations=2, Packaging="Tape and Reel", Radiation Hardening=No, RoHS Compliant=Yes, Series=RMCF, Width=0.098inch
R20_Designator1 R20_Designator2 R20_Designator3 R20_Designator4 R20_Designator5 R20_Designator6 R20_Designator7 R20_Designator8 R20_Designator9 R20_Designator10 R20_Designator11 R20_Designator12: library part CMP-26527-000722-1, "3Ω ±5% 0.5W 1210 Thick Film Chip Resistor AEC-Q200 compliant", Case Code (Imperial)=1210, Case Code (Metric)=3225, Max Operating Temperature=155°C, Max Power Dissipation=500mW, Min Operating Temperature=-55°C, Resistance=3R, Resistor Type="Thick Film", Temperature Coefficient=400ppm/°C, Tolerance=5%, Case/Package=1210, Contact Plating=Tin, Features="Automotive AEC-Q200", Height=0.028inch, Length=0.126inch, Mount="Surface Mount", Number of Terminations=2, Packaging="Tape and Reel", Radiation Hardening=No, RoHS Compliant=Yes, Series=RMCF, Width=0.098inch
R21_Designator1 R21_Designator2 R21_Designator3 R21_Designator4 R21_Designator5 R21_Designator6 R21_Designator7 R21_Designator8 R21_Designator9 R21_Designator10 R21_Designator11 R21_Designator12: library part CMP-1015-00623-2, Manufacturer=Panasonic, Part Number=ERJ-14NF1002U
R22_Designator1 R22_Designator2 R22_Designator3 R22_Designator4 R22_Designator5 R22_Designator6 R22_Designator7 R22_Designator8 R22_Designator9 R22_Designator10 R22_Designator11 R22_Designator12: library part CMP-26527-003986-1, "12Ω ±5% 0.5W 1210 Thick Film Chip Resistor AEC-Q200 compliant", Case/Package=1210, Max Operating Temperature=155°C, Max Power Dissipation=500mW, Min Operating Temperature=-55°C, Resistance=12R, Resistor Type="Thick Film", Temperature Coefficient=200ppm/°C, Tolerance=5%, Contact Plating=Tin, Features="Automotive AEC-Q200", Height=0.028inch, Length=0.126inch, Mount="Surface Mount", Number of Terminations=2, Packaging="Tape and Reel", Radiation Hardening=No, RoHS Compliant=Yes, Series=RMCF, Width=0.098inch
U1 U2: library part CMP-015-00008-2, "PCB layout of Arduino MCP2515 shield to avoid remaking the schematic and ordering individual components when I already have a dozen shields on hand."
U3 U4: library part CMP-002-000002-2, "Mega 2560 PRO (Embed) CH340G/ATmega2560-16AU", Package=None, Availability=Unavailable, Component Type=Standard, Design Item ID=MEGA_PRO_EMBED_CH340G_/_ATMEGA2560, MP=MEGA_PRO_EMBED_CH340G_/_ATMEGA2560, Pin Count=86, Price=None, Source=MEGA_PRO_EMBED_CH340G___ATMEGA2560.SchLib
U5 U6 U9: library part CMP-0017-00005-2, "Quad Low-Noise JFET-Input General-Purpose Operational Amplifier, 7 to 36 V, 0 to 70 degC, 14-pin SOIC (D14), Green (RoHS & no Sb/Br)", Manufacturer="Texas Instruments", Rating=Military, Total Supply Voltage(Max)(+5V is 5, +/-5V is 10)=36, Total Supply Voltage(Min)(+5V is 5, +/-5V is 10)=7, CMRR(Min)(dB)=70, Code_JEDEC=MS-012, ComponentLink1Description="Manufacturer URL", ComponentLink1URL=http://www.ti.com/, ComponentLink2Description=Datasheet, ComponentLink2URL=http://www.ti.com/lit/ds/symlink/tl074.pdf, ComponentLink3Description="Package Specification", ComponentLink3URL=http://www.ti.com/lit/ml/mpds177g/mpds177g.pdf, DatasheetVersion=SLOS080J, Eco-Plan="Green (RoHS & no Sb/Br)", GBW(Typ)(MHz)=3, IIB(Max)(pA)=200, Iq per channel(Max)(mA)=2.5, Mounting Technology="Surface Mount", Number Of Channels=4, Offset Drift(Typ)(uV/C)=18, PackageDescription="14-Pin Plastic Small Outline, Body 8.65 x 3.90 mm, Pitch 1.27 mm", PackageReference=D0014A, PackageVersion="4040047-5/M, 06/2011", PartNumber=TL074CD, Slew Rate(Typ)(V/us)=13, Sub Family="General Purpose Amplifier, High Supply Voltage Amplifier (>=30V)", Vio (25C)(Max)(mV)=10, Vn at 1kHz(Typ)(nV/rtHz)=18
U7 U8: library part CMP-0069-00304-3, "IC REG BUCK 5V 5A TO263-7", Case/Package=TO-263, Frequency=500kHz, Max Input Voltage=42V, Max Operating Temperature=125°C, Max Output Current=5A, Max Output Voltage=5V, Min Input Voltage=4.5V, Min Operating Temperature=-40°C, Min Supply Voltage=8V, Package Quantity=250, Quiescent Current=3.4mA, Contact Plating=Tin, Efficiency=90%, Height=2mm, Lead Free="Lead Free", Length=10.16mm, Max Supply Voltage=42V, Mount="Surface Mount", Nominal Output Voltage=5V, Number Of Outputs=1, Number of Pins=7, Output Current=5A, Output Type=Fixed, Output Voltage=5V, Packaging="Cut Tape", Radiation Hardening=No, REACH SVHC="No SVHC", RoHS Compliant=Yes, Series="SIMPLE SWITCHER®", Switching Frequency=500kHz, Synchronous Rectifier=No, Termination=SMD/SMT, Width=9.85mm

## Nets (pads, with @x,y where several pads share a name; then routed paths per layer and width w, separated by ;. In a path a pad name is that pad's centre, name@x,y a point inside that pad or via, vN(x,y) a via of type N, cw(c..) or ccw(c..) an arc to the next point about the centre after c; other vN are vias at no path point)
5V_BUS_REGULATOR: D4.1 D6.1 U1.7 U2.7 U3.5V_1 U3.5V_2 U3.5V_3 U4.5V_1 U4.5V_2 U4.5V_3 U5.4 U6.4 U9.4
ADDR_1: J4.1 U3.D14 U4.D14
ADDR_2: J4.2 U3.D15 U4.D15
ADDR_3: J4.3 U3.D16 U4.D16
ADDR_4: J4.4 U3.D17 U4.D17
ADDR_5: J4.5 U3.D18 U4.D18
ADDR_6: J4.6 U3.D19 U4.D19
ADDR_7: J4.7 U3.D20 U4.D20
ADDR_8: J4.8 U3.D21 U4.D21
CAN_H: J5.1 U1.9 U2.9
CAN_L: J5.2 U1.8 U2.8
CS_1: U1.5 U3.D53
CS_2: U2.5 U4.D53
DIAG_1: R11.2 U3.A0 U4.A0 U5.1
DIAG_2: R13.2 U3.A1 U4.A1 U5.7
DIAG_3: R15.2 U3.A2 U4.A2 U5.8
DIAG_4: R17.2 U3.A3 U4.A3 U5.14
DIAG_5: R12.2 U3.A4 U4.A4 U6.1
DIAG_6: R14.2 U3.A5 U4.A5 U6.7
DIAG_7: R16.2 U3.A6 U4.A6 U6.8
DIAG_8: R18.2 U3.A7 U4.A7 U6.14
DIAG_9: R1.2 U3.A8 U4.A8 U9.1
DIAG_10: R2.2 U3.A9 U4.A9 U9.7
DIAG_11: R7.2 U9.8
DIAG_12: R8.2 U9.14
EXT_SENSE_1: R3.2 R4.1 U3.A12 U4.A12
EXT_SENSE_2: R5.2 R6.1 U3.A13 U4.A13
GND: C4.1 C6.1 D5.2 D7.2 J3.3 J3.4 R3.1 R5.1 R21_Designator1.2 R21_Designator2.2 R21_Designator3.2 R21_Designator4.2 R21_Designator5.2 R21_Designator6.2 R21_Designator7.2 R21_Designator8.2 R21_Designator9.2 R21_Designator10.2 R21_Designator11.2 R21_Designator12.2 U1.6 U2.6 U3.GND_1 U3.GND_2 U3.GND_3 U4.GND_1 U4.GND_2 U4.GND_3 U5.3 U5.5 U5.10 U5.11 U5.12 U6.3 U6.5 U6.10 U6.11 U6.12 U7.4 U7.8 U8.4 U8.8 U9.3 U9.5 U9.10 U9.11 U9.12
IN_1: J2.5 R4.2
IN_2: J2.6 R6.2
MISO_1: U1.4 U3.MISO
MISO_2: U2.4 U4.MISO
MOSI_1: U1.3 U3.MOSI
MOSI_2: U2.3 U4.MOSI
NetC3_1: C3.1 U7.3
NetC3_2: C3.2 D5.1 L2.1 U7.1
NetC5_1: C5.1 U8.3
NetC5_2: C5.2 D7.1 L3.1 U8.1
NetD2_Designator1_2: D2_Designator1.2 Q1_Designator1.2 R20_Designator1.1
NetD2_Designator2_2: D2_Designator2.2 Q1_Designator2.2 R20_Designator2.1
NetD2_Designator3_2: D2_Designator3.2 Q1_Designator3.2 R20_Designator3.1
NetD2_Designator4_2: D2_Designator4.2 Q1_Designator4.2 R20_Designator4.1
NetD2_Designator5_2: D2_Designator5.2 Q1_Designator5.2 R20_Designator5.1
NetD2_Designator6_2: D2_Designator6.2 Q1_Designator6.2 R20_Designator6.1
NetD2_Designator7_2: D2_Designator7.2 Q1_Designator7.2 R20_Designator7.1
NetD2_Designator8_2: D2_Designator8.2 Q1_Designator8.2 R20_Designator8.1
NetD2_Designator9_2: D2_Designator9.2 Q1_Designator9.2 R20_Designator9.1
NetD2_Designator10_2: D2_Designator10.2 Q1_Designator10.2 R20_Designator10.1
NetD2_Designator11_2: D2_Designator11.2 Q1_Designator11.2 R20_Designator11.1
NetD2_Designator12_2: D2_Designator12.2 Q1_Designator12.2 R20_Designator12.1
NetD3_Designator1_2: D3_Designator1.2 Q2_Designator1.2 R22_Designator1.1
NetD3_Designator2_2: D3_Designator2.2 Q2_Designator2.2 R22_Designator2.1
NetD3_Designator3_2: D3_Designator3.2 Q2_Designator3.2 R22_Designator3.1
NetD3_Designator4_2: D3_Designator4.2 Q2_Designator4.2 R22_Designator4.1
NetD3_Designator5_2: D3_Designator5.2 Q2_Designator5.2 R22_Designator5.1
NetD3_Designator6_2: D3_Designator6.2 Q2_Designator6.2 R22_Designator6.1
NetD3_Designator7_2: D3_Designator7.2 Q2_Designator7.2 R22_Designator7.1
NetD3_Designator8_2: D3_Designator8.2 Q2_Designator8.2 R22_Designator8.1
NetD3_Designator9_2: D3_Designator9.2 Q2_Designator9.2 R22_Designator9.1
NetD3_Designator10_2: D3_Designator10.2 Q2_Designator10.2 R22_Designator10.1
NetD3_Designator11_2: D3_Designator11.2 Q2_Designator11.2 R22_Designator11.1
NetD3_Designator12_2: D3_Designator12.2 Q2_Designator12.2 R22_Designator12.1
NetQ1_Designator1_1: Q1_Designator1.1 Q2_Designator1.1 R19_Designator1.2
NetQ1_Designator2_1: Q1_Designator2.1 Q2_Designator2.1 R19_Designator2.2
NetQ1_Designator3_1: Q1_Designator3.1 Q2_Designator3.1 R19_Designator3.2
NetQ1_Designator4_1: Q1_Designator4.1 Q2_Designator4.1 R19_Designator4.2
NetQ1_Designator5_1: Q1_Designator5.1 Q2_Designator5.1 R19_Designator5.2
NetQ1_Designator6_1: Q1_Designator6.1 Q2_Designator6.1 R19_Designator6.2
NetQ1_Designator7_1: Q1_Designator7.1 Q2_Designator7.1 R19_Designator7.2
NetQ1_Designator8_1: Q1_Designator8.1 Q2_Designator8.1 R19_Designator8.2
NetQ1_Designator9_1: Q1_Designator9.1 Q2_Designator9.1 R19_Designator9.2
NetQ1_Designator10_1: Q1_Designator10.1 Q2_Designator10.1 R19_Designator10.2
NetQ1_Designator11_1: Q1_Designator11.1 Q2_Designator11.1 R19_Designator11.2
NetQ1_Designator12_1: Q1_Designator12.1 Q2_Designator12.1 R19_Designator12.2
NetR1_1: R1.1 R20_Designator2.2 R22_Designator2.2 U9.2
NetR2_1: R2.1 R20_Designator1.2 R22_Designator1.2 U9.6
NetR7_1: R7.1 R20_Designator11.2 R22_Designator11.2 U9.9
NetR8_1: R8.1 R20_Designator12.2 R22_Designator12.2 U9.13
NetR11_1: R11.1 R20_Designator10.2 R22_Designator10.2 U5.2
NetR12_1: R12.1 R20_Designator6.2 R22_Designator6.2 U6.2
NetR13_1: R13.1 R20_Designator9.2 R22_Designator9.2 U5.6
NetR14_1: R14.1 R20_Designator5.2 R22_Designator5.2 U6.6
NetR15_1: R15.1 R20_Designator8.2 R22_Designator8.2 U5.9
NetR16_1: R16.1 R20_Designator4.2 R22_Designator4.2 U6.9
NetR17_1: R17.1 R20_Designator7.2 R22_Designator7.2 U5.13
NetR18_1: R18.1 R20_Designator3.2 R22_Designator3.2 U6.13
NetU3_D52: U3.D52 U4.RST
NetU3_RST: U3.RST U4.D52
NetU3_RX: U3.RX U4.TX
NetU3_TX: U3.TX U4.RX
OUT_1: D2_Designator10.1 D3_Designator10.1 J1.1
OUT_2: D2_Designator9.1 D3_Designator9.1 J1.2
OUT_3: D2_Designator8.1 D3_Designator8.1 J1.3
OUT_4: D2_Designator7.1 D3_Designator7.1 J1.4
OUT_5: D2_Designator6.1 D3_Designator6.1 J1.5
OUT_6: D2_Designator5.1 D3_Designator5.1 J1.6
OUT_7: D2_Designator4.1 D3_Designator4.1 J2.1
OUT_8: D2_Designator3.1 D3_Designator3.1 J2.2
OUT_9: D2_Designator2.1 D3_Designator2.1 J2.3
OUT_10: D2_Designator1.1 D3_Designator1.1 J2.4
OUT_11: D2_Designator11.1 D3_Designator11.1
OUT_12: D2_Designator12.1 D3_Designator12.1
P_SENSE_1: C4.2 D4.2 L2.2 U3.A10 U4.A10 U7.6
P_SENSE_2: C6.2 D6.2 L3.2 U3.A11 U4.A11 U8.6
SCK_1: U1.2 U3.SCK
SCK_2: U2.2 U4.SCK
TRIG_1: R19_Designator10.1 R21_Designator10.1 U3.D2 U4.D2
TRIG_2: R19_Designator9.1 R21_Designator9.1 U3.D3 U4.D3
TRIG_3: R19_Designator8.1 R21_Designator8.1 U3.D4 U4.D4
TRIG_4: R19_Designator7.1 R21_Designator7.1 U3.D5 U4.D5
TRIG_5: R19_Designator6.1 R21_Designator6.1 U3.D6 U4.D6
TRIG_6: R19_Designator5.1 R21_Designator5.1 U3.D7 U4.D7
TRIG_7: R19_Designator4.1 R21_Designator4.1 U3.D8 U4.D8
TRIG_8: R19_Designator3.1 R21_Designator3.1 U3.D9 U4.D9
TRIG_9: R19_Designator2.1 R21_Designator2.1 U3.D10 U4.D10
TRIG_10: R19_Designator1.1 R21_Designator1.1 U3.D11 U4.D11
TRIG_11: R19_Designator11.1 R21_Designator11.1
TRIG_12: R19_Designator12.1 R21_Designator12.1
V_IN_REGULATOR: J3.1 J3.2 Q1_Designator1.3 Q1_Designator2.3 Q1_Designator3.3 Q1_Designator4.3 Q1_Designator5.3 Q1_Designator6.3 Q1_Designator7.3 Q1_Designator8.3 Q1_Designator9.3 Q1_Designator10.3 Q1_Designator11.3 Q1_Designator12.3 Q2_Designator1.3 Q2_Designator2.3 Q2_Designator3.3 Q2_Designator4.3 Q2_Designator5.3 Q2_Designator6.3 Q2_Designator7.3 Q2_Designator8.3 Q2_Designator9.3 Q2_Designator10.3 Q2_Designator11.3 Q2_Designator12.3 U7.2 U8.2
pads on no net: J1. J2. J3. J4. J5. U1.1 U2.1 U3.3V3_1 U3.3V3_2 U3.A14 U3.A15 U3.AREF U3.D12 U3.D13 U3.D22 U3.D23 U3.D24 U3.D25 U3.D26 U3.D27 U3.D28 U3.D29 U3.D30 U3.D31 U3.D32 U3.D33 U3.D34 U3.D35 U3.D36 U3.D37 U3.D38 U3.D39 U3.D40 U3.D41 U3.D42 U3.D43 U3.D44 U3.D45 U3.D46 U3.D47 U3.D48 U3.D49 U3.D50 U3.D51 U3.RESET U3.VIN_1 U3.VIN_2 U4.3V3_1 U4.3V3_2 U4.A14 U4.A15 U4.AREF U4.D12 U4.D13 U4.D22 U4.D23 U4.D24 U4.D25 U4.D26 U4.D27 U4.D28 U4.D29 U4.D30 U4.D31 U4.D32 U4.D33 U4.D34 U4.D35 U4.D36 U4.D37 U4.D38 U4.D39 U4.D40 U4.D41 U4.D42 U4.D43 U4.D44 U4.D45 U4.D46 U4.D47 U4.D48 U4.D49 U4.D50 U4.D51 U4.RESET U4.VIN_1 U4.VIN_2 U7.5 U7.7 U8.5 U8.7